# Altium PCB CPUboard.PcbDoc
Units mm, origin at the board's own origin, x right, y up, seen from the top; angles counter-clockwise.
Board outline 73.1 x 74.3 mm, 2 copper layers (Top Layer, Bottom Layer); 31 components, 44 nets, 136 pads, 0 vias.
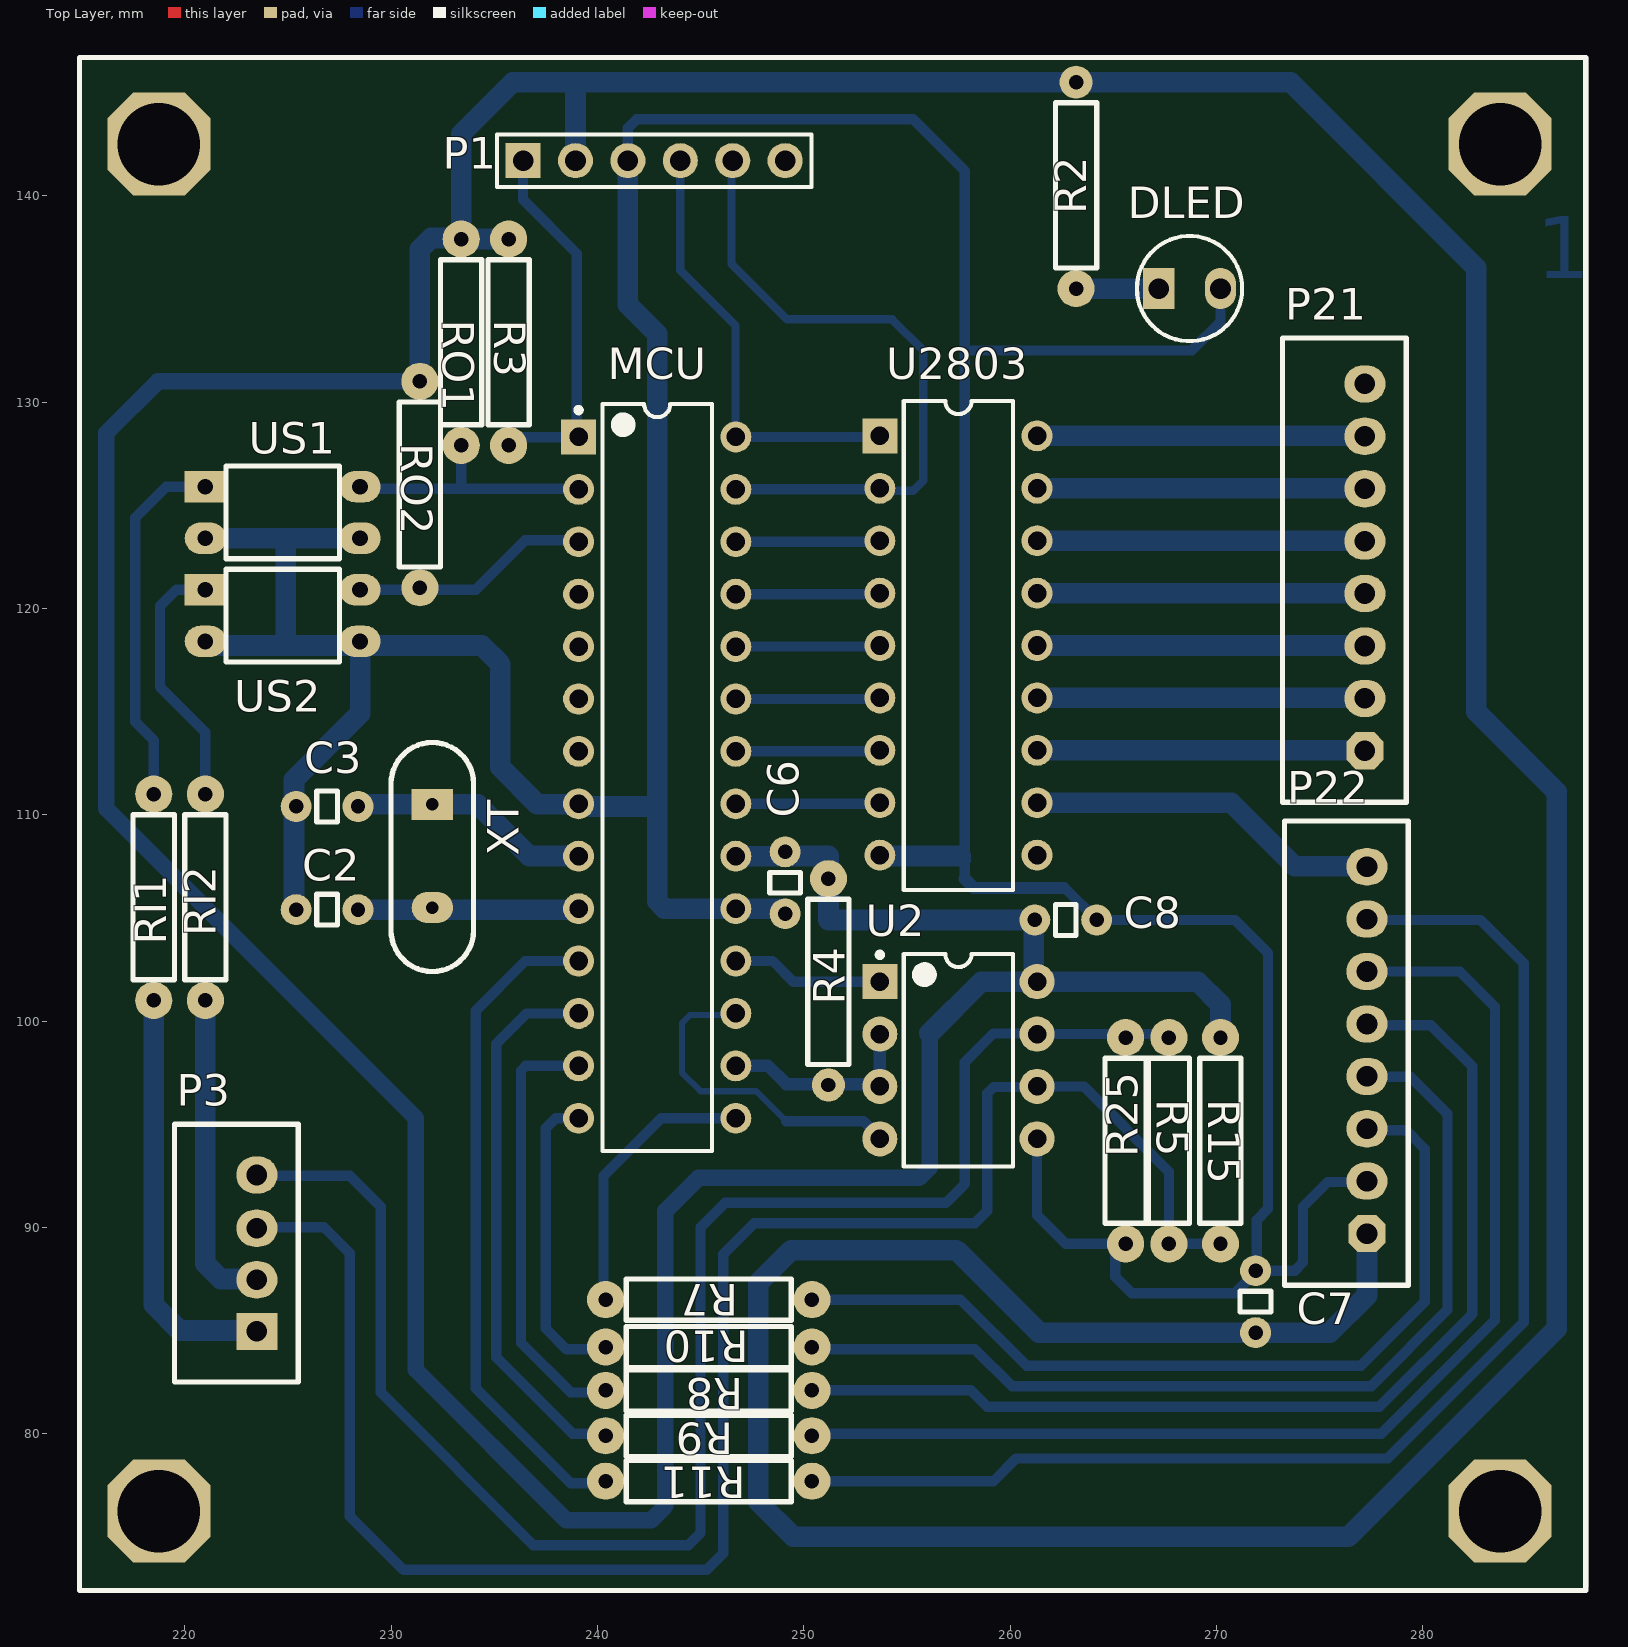
[diagram p0: Top Layer view]
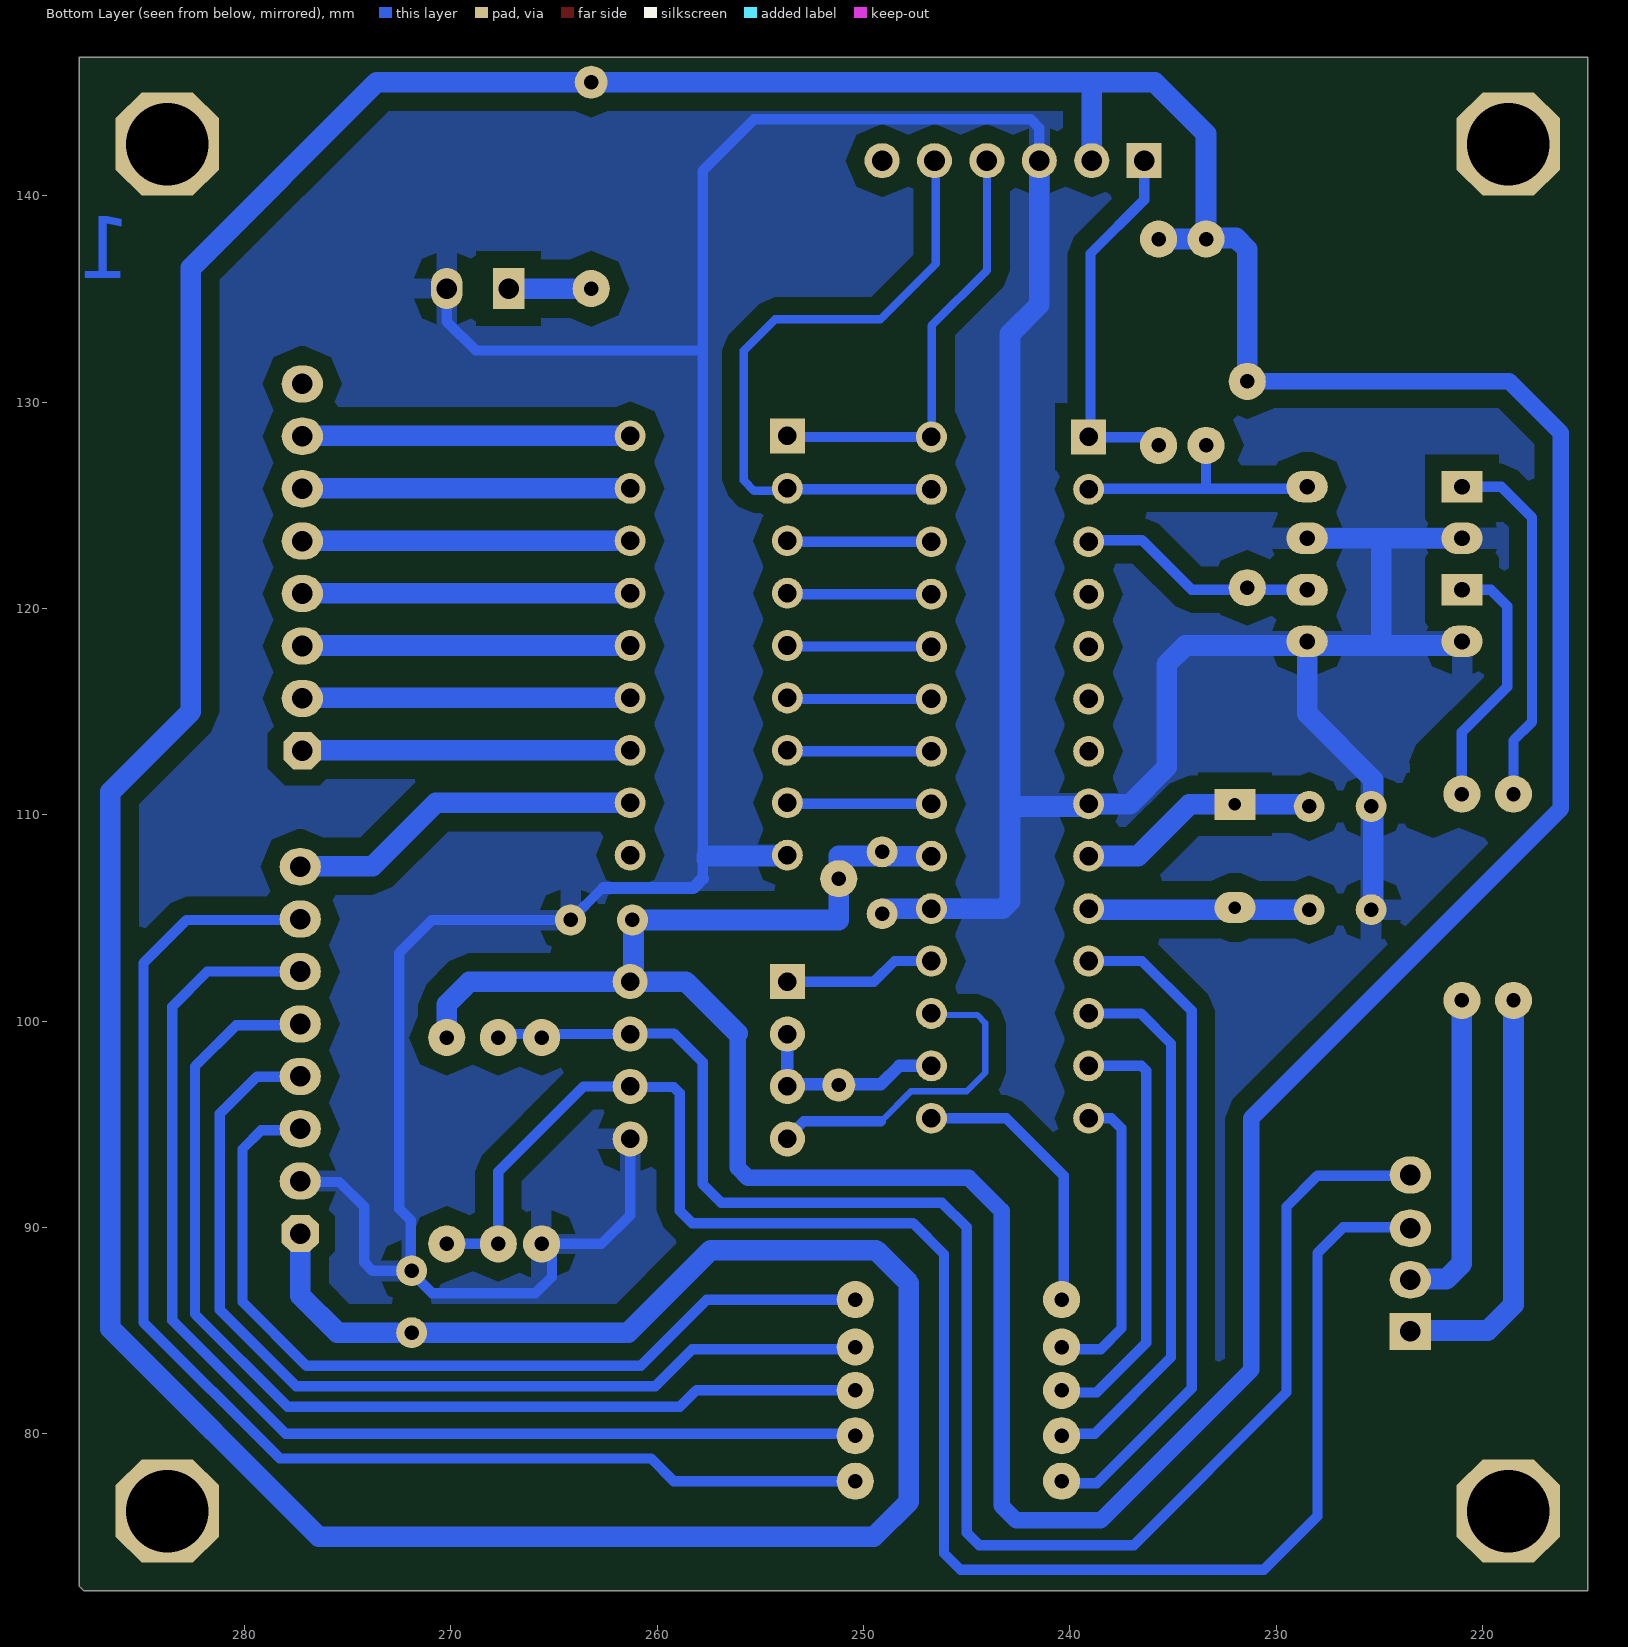
[diagram p1: Bottom Layer view, seen from below]

## Layer stack, top to bottom
Top Layer: signal copper 0.0356
Dielectric: dielectric 0.32, FR-4, Dk 4.8
Bottom Layer: signal copper 0.0356

## Board outline
214.9,146.6 214.9,72.4 287.8,72.4 287.9,72.5 288,72.6 288,146.7 214.9,146.7

## Design rules (kind name [scope] priority, off if disabled: settings)
Clearance [All] p1: gap=0.5
PlaneClearance [All] p1: clearance=0.8
PlaneConnect [All] p1: planeconnectstyle=Relief reliefexpansion=1 reliefentries=4 reliefconductorwidth=1 reliefairgap=1
PolygonConnect [All] p1: connectstyle=Relief reliefconductorwidth=1 reliefentries=4 polygonreliefangle="90 Angle"
RoutingLayers [All] p1: top layer_v5=FALSE bottom layer_v5=TRUE
RoutingTopology [All] p1: topology=Daisy_Balanced
RoutingVias [All] p1: holewidth=1 width=1.5 viastyle="Through Hole" minholewidth=0.711 minwidth=1.27 maxholewidth=1.5 maxwidth=2
SilkscreenOverComponentPads [All] p1: minsilkscreentomaskgap=0.254
SolderMaskExpansion [All] p1: expansion=1
Width [All] p1: maxlimit=2 minlimit=0.4 preferedwidth=1
23 further rules are at their usual default settings.

## Components (designator, comment, footprint, x,y, rotation, side; value= is the part's Value field where it differs from the comment)
C2 "Cap" tu_gom 226.4,105.4 r180 top
C3 "Cap" tu_gom 226.4,110.4 r180 top
C6 "Cap" tu_gom 249.1,106.2 r270 top
C7 "Cap" tu_gom 271.9,85.9 r270 top
C8 "Cap" tu_gom 262.2,104.9 r180 top
DLED "LED0" LED_3 268.2,135.5 r0 top
MCU "PIC16F883-I/SP" SPDIP300-SP28 242.9,111.8 r0 top
P1 "Header 6" HDR1X6 236.4,141.7 r0 top
P3 "Header 4" "CAP 4" 223.5,90 r90 top
P21 "Header 8" Cap_8 277.2,113.1 r90 top
P22 "Header 8" Cap_8 277.3,89.7 r90 top
R2 "1K" R_Nor#1 263.2,140.5 r90 top
R3 "10K" R_Nor#2 235.7,132.9 r90 top
R4 "10K" R_Nor#3 251.2,101.9 r90 top
R5 "120R" R_Nor#2 267.7,94.2 r90 top
R7 "1K" R_Nor#2 245.4,86.5 r0 top
R8 "1K" R_Nor#2 245.4,82.1 r0 top
R9 "1K" R_Nor#2 245.4,79.9 r0 top
R10 "1K" R_Nor#2 245.4,84.2 r0 top
R11 "1K" R_Nor#2 245.4,77.7 r0 top
R15 "560R" R_Nor#2 270.2,94.2 r90 top
R25 "560R" R_Nor#2 265.6,94.2 r90 top
RI1 "1K" R_Nor#2 218.5,106 r270 top
RI2 "1K" R_Nor#2 221,106 r270 top
RO1 "10K" R_Nor#2 233.4,132.9 r90 top
RO2 "10K" R_Nor#2 231.4,126 r90 top
U2 "MAX485CPA" PA8 257.5,98.1 r0 top
U2803 "ULN2803A" DIP18 257.5,118.2 r270 top
US1 "Optoisolator1" Opto 221,123.4 r90 top
US2 "Optoisolator1" Opto 221,118.4 r90 top
XT "XTAL" Xtal12M 230,107.5 r270 top

## Footprints (in the part's own frame and the unit in brackets; to place one, negate y for a bottom-side part, rotate by r counter-clockwise, add the part's x,y. Pads: shape width x height; smd on the part's side, far side on the other; paste and mask are expansions set on the pad)
"CAP 4" [mm]
  rect 1.8x2 hole 1: 1(-5.04,0)
  oval 1.8x2 hole 1: 2(-2.54,0) 3(-0.04,0) 4(2.54,0)
  silkscreen extent -7.5,-2 5,4
Cap_8 [mm]
  oct 1.8x1.8 hole 1: 1(0,0)
  oval 1.8x2 hole 1: 2(2.54,0) 3(5.08,0) 4(7.62,0) 5(10.16,0) 6(12.7,0) 7(15.24,0) 8(17.78,0)
  silkscreen extent -2.5,-2 20,4
DIP18 [mm] "DIP; 18 Leads; Row Spacing 7.62 mm; Pitch 2.54 mm"
  rect 1.7x1.7 hole 0.9: 1(-10.16,-3.81)
  round 1.5 hole 0.9: 2(-7.62,-3.81) 3(-5.08,-3.81) 4(-2.54,-3.81) 5(0,-3.81) 6(2.54,-3.81) 7(5.08,-3.81) 8(7.62,-3.81) 9(10.16,-3.81) 10(10.16,3.81) 11(7.62,3.81) 12(5.08,3.81) 13(2.54,3.81) 14(0,3.81) 15(-2.54,3.81) 16(-5.08,3.81) 17(-7.62,3.81) 18(-10.16,3.81)
  silkscreen extent -11.85,-2.65 11.85,2.65
HDR1X6 [mm] "Connector; Header; 6 Position"
  rect 1.7x1.7 hole 1: 1(0,0)
  round 1.7 hole 1: 2(2.54,0) 3(5.08,0) 4(7.62,0) 5(10.16,0) 6(12.7,0)
  silkscreen extent -1.27,-1.27 13.97,1.27
LED_3 [mm]
  rect 1.524x2 hole 1: 1(-1,0)
  oval 1.524x2 hole 1: 2(2,0)
  silkscreen extent -2.05,-2.55 3.05,2.55
Opto [mm]
  rect 1.524x2 hole 0.762: 1(2.5,0)
  oval 1.524x2 hole 0.762: 2(0,0) 3(0,-7.5) 4(2.5,-7.5)
  silkscreen extent -1,-6.5 3.5,-1
PA8 [mm] "DIP, 8-Leads, Row Spacing 7.62mm, Pitch 2.54mm, Body 9.38x7.24mm"
  rect 1.7x1.7 hole 0.9: 1(-3.81,3.81)
  round 1.7 hole 0.9: 2(-3.81,1.27) 3(-3.81,-1.27) 4(-3.81,-3.81) 5(3.81,-3.81) 6(3.81,-1.27) 7(3.81,1.27) 8(3.81,3.81)
  silkscreen extent -3.93,-5.15 2.65,5.23, body extent -3.6,-5.15 3.6,5.15, height 4.58
R_Nor#1 [mm]
  round 1.8 hole 0.7: 1(-5,0)
  round 1.6 hole 0.7: 2(5,0)
  silkscreen extent -4,-1 4,1
R_Nor#2 [mm]
  round 1.8 hole 0.7: 1(-5,0) 2(5,0)
  silkscreen extent -4,-1 4,1
R_Nor#3 [mm]
  round 1.6 hole 0.7: 1(-5,0)
  round 1.8 hole 0.7: 2(5,0)
  silkscreen extent -4,-1 4,1
SPDIP300-SP28 [mm] "DIP, 28-Leads, Row Spacing 7.62mm, Pitch 2.54mm, Body 34.9x6.8mm"
  rect 1.7x1.7 hole 0.9: 1(-3.81,16.51)
  round 1.5 hole 0.9: 2(-3.81,13.97) 3(-3.81,11.43) 4(-3.81,8.89) 5(-3.81,6.35) 6(-3.81,3.81) 7(-3.81,1.27) 8(-3.81,-1.27) 9(-3.81,-3.81) 10(-3.81,-6.35) 11(-3.81,-8.89) 12(-3.81,-11.43) 13(-3.81,-13.97) 14(-3.81,-16.51) 15(3.81,-16.51) 16(3.81,-13.97) 17(3.81,-11.43) 18(3.81,-8.89) 19(3.81,-6.35) 20(3.81,-3.81) 21(3.81,-1.27) 22(3.81,1.27) 23(3.81,3.81) 24(3.81,6.35) 25(3.81,8.89) 26(3.81,11.43) 27(3.81,13.97) 28(3.81,16.51)
  silkscreen extent -3.93,-18.1 2.65,18.1, body extent -3.55,-18.1 3.55,18.1, height 5.08
tu_gom [mm]
  round 1.5 hole 0.7: 1(-2,0) 2(1,0)
  silkscreen extent -1,-0.75 0,0.75
Xtal12M [mm]
  rect 1.5x2 hole 0.6: 1(-3,2)
  oval 1.5x2 hole 0.6: 2(2,2)
  silkscreen extent -6,0 5.1,4

## Part data
C2 C3 C6 C7 C8: library part Ceramic, "Capcitor"
DLED: "Typical INFRARED GaAs LED"
MCU: "Flash-Based, 8-Bit CMOS Microcontroller with nanoWatt Technology, 4K (x14-Bit words) Program Memory, 512 Bytes Data Memory, 24 I/O pins, 28-Pin SPDIP, Standard VDD Range, Industrial Temperature"
P1: "Header, 6-Pin"
P3: "Header, 4-Pin"
P21 P22: "Header, 8-Pin"
R2 R3 R4 R5 R7 R8 R9 R10 R11 R15 R25 RI1 RI2 RO1 RO2: library part Res
U2: "Low-Power, Slew-Rate-Limited RS-485/RS-422 Transceiver"
U2803: "Eight Darlington Array"
US1 US2: "4-Pin Phototransistor Optocoupler"
XT: "Crystal Oscillator"

## Free pads (board coordinates)
  oct 5x5 hole 4: 0(218.75,142.5) 1(283.75,142.5) 2(283.75,76.25) 3(218.75,76.25)

## Nets (pads, with @x,y where several pads share a name; then routed paths per layer and width w, separated by ;. In a path a pad name is that pad's centre, name@x,y a point inside that pad or via, vN(x,y) a via of type N, cw(c..) or ccw(c..) an arc to the next point about the centre after c; other vN are vias at no path point)
A: P21.7 U2803.18 | length 15.9
  Bottom Layer w1: U2803.18 P21.7@277.16,128.36
A1: P22.3 R7.2 | length 43.1
  Bottom Layer w0.5: R7.2@250.3,86.5 R7.2 257.6,86.5 260.8,83.3 277,83.3 280.1,86.4 280.1,93.8 279.2,94.7 P22.3@277.3,94.7 ; R7.2@250.8,87 R7.2@250.85,86.95
A2: P22.4 R10.2 | length 46.4
  Bottom Layer w0.5: R10.2@251.2,84.1 258.3,84.1 260.1,82.3 277.5,82.3 281.2,86 281.2,95.5 279.4,97.3 P22.4@277.3,97.3
A3: P22.5 R8.2 | length 52.3
  Bottom Layer w0.5: R8.2@250.3,82.4 250.4,82.4 250.55,82.25 250.7,82.1 258.1,82.1 258.9,81.3 277.9,81.3 282.4,85.8 282.4,97.8 280.4,99.8 P22.5@277.3,99.8
A4: P22.6 R9.2 | length 57.7
  Bottom Layer w0.5: R9.2@250.2,80.3 R9.2@250.4,80.3 ; R9.2@250.5,80.3 250.65,80.15 250.8,80 278,80 283.5,85.5 283.5,100.7 281.8,102.4 P22.6
A5: P22.7 R11.2 | length 63.6
  Bottom Layer w0.5: R11.2 259.2,77.7 260.3,78.8 278.3,78.8 284.9,85.4 284.9,102.8 282.8,104.9 P22.7@277.3,104.9
A_485: P3.3 R5.1 R15.1 U2.6 | length 87.8
  Bottom Layer w0.5: P3.3@223.5,90 226.75,90 228,88.75 228,76 230.6,73.4 245.3,73.4 246.1,74.2 246.1,88.7 247.6,90.2 258.3,90.2 258.9,90.8 258.9,96.5 259.2,96.8 261.31,96.8 U2.6@261.4,96.8 ; U2.6 263.57,96.83 267.7,92.7 R5.1 R15.1@270.1,89.2
B: P21.6 U2803.17 | length 16
  Bottom Layer w1: U2803.17 277.2,125.82 P21.6@277.28,125.82
B_485: P3.4 R5.2 R25.2 U2.7 | length 79.8
  Bottom Layer w0.5: P3.4@223.5,92.5 228,92.5 229.5,91 229.5,82 236.9,74.6 244.4,74.6 245,75.2 245,90 246.2,91.2 256.9,91.2 257.8,92.1 257.8,98 259.2,99.4 U2.7@261.3,99.4 ; U2.7 265.6,99.37 R5.2@267.43,99.37 ; R5.2@267.4,99.4 R5.2@267.43,99.37 ; R5.2@267.65,99.15 R5.2@267.43,99.37 ; R5.2@267.9,99.37 267.7,99.37 R5.2@267.43,99.37
C: P21.5 U2803.16 | length 15.9
  Bottom Layer w1: U2803.16 277.2,123.28 P21.5@277.22,123.28
D: P21.4 U2803.15 | length 16
  Bottom Layer w1: U2803.15 277.2,120.74 P21.4@277.26,120.74
DI: MCU.17 U2.4 | length 16
  Bottom Layer w0.3: MCU.17@246.8,100.3 246.71,100.3 244.5,100.3 244.1,99.9 244.1,97.5 245,96.6 247.7,96.6 249.15,95.15 249.2,95.1
  Bottom Layer w0.5: 249.15,95.15 252.754,95.15 ; 252.9,95.15 U2.4@253.65,94.4
DOT: P22.8 U2803.11 | length 17.4
  Bottom Layer w1: U2803.11 270.72,110.58 273.8,107.5 277.3,107.5 P22.8@277.4,107.5
E: P21.3 U2803.14 | length 16.1
  Bottom Layer w1: U2803.14 277.2,118.2 P21.3@277.4,118.2
EN: MCU.16 R4.1 U2.2 U2.3 | length 9.8
  Bottom Layer w0.6: MCU.16@246.715,97.835 248.265,97.835 249.16,96.94 251.2,96.94 253.69,96.94 U2.2 ; U2.3@253.65,96.9 U2.3@253.69,96.9
F: P21.2 U2803.13 | length 15.9
  Bottom Layer w1: U2803.13 P21.2@277.16,115.66
G: P21.1 U2803.12 | length 15.9
  Bottom Layer w1: U2803.12 P21.1@277.18,113.12
GND: C2.2 C3.2 C6.2 C7.1 C8.1 DLED.2 MCU.8 MCU.19 P1.3 P22.2 R25.1 U2.5 U2803.9 US1.2 US1.3 US2.2 US2.3 | length 227.6
  Bottom Layer w0.5: C3.2@225.3,110.4 C3.2@225.3,110.5 ; C3.2@225.4,110.3 C3.2 C3.2@225.4,110.5 ; MCU.8 239.09,110.46 MCU.8@239.15,110.4 ; P1.3 241.48,143.28 241.9,143.7 255.3,143.7 257.8,141.2 257.8,107.8 257.8,106.9 ; 257.9,132.5 268.8,132.5 270.2,133.9 DLED.2 ; U2.5@261.3,94.3 U2.5@261.31,94.3 ; U2.5 261.31,90.59 262.7,89.2 265.1,89.2 265.1,87.6 265.9,86.8 270.9,86.8 271.95,87.85 C7.1@271.95,87.9 ; 262.7,106.4 C8.1 ; C8.1 270.9,104.9 272.5,103.3 272.5,90.9 271.95,90.35 C7.1@271.95,87.9 ; C7.1 C7.1@271.95,87.9 ; P22.2@276.8,92.1 276.7,92.2 275.4,92.2 274.2,91 274.2,88.3 273.8,87.9 C7.1@271.95,87.9
  Bottom Layer w0.6: 257.6,108 257.8,107.8 ; 257.8,106.9 258.25,106.45 262.6,106.45
  Bottom Layer w1: US2.2@221,118.2 224.9,118.2 ; US1.2 US1.3 ; 224.9,123.3 224.9,118.2 ; C2.2@225.3,105.5 C3.2@225.3,110.4 ; C3.2@225.3,110.5 225.3,111.7 228.5,114.9 US2.3@228.5,118.2 ; MCU.8@239,110.5 237.1,110.5 235.3,112.3 235.3,117.3 234.4,118.2 US2.3@228.5,118.2 ; MCU.8@239.15,110.4 242.9,110.4 ; P1.3 241.48,134.72 242.9,133.3 242.9,110.4 ; MCU.19@246.66,105.4 MCU.19 ; C6.2@249.225,105.325 249.1,105.45 MCU.19 ; U2803.9@253.6,108 253.69,108 257.6,108 ; U2.5 U2.5@261.4,94.2 ; 224.9,118.2 US2.3@228.5,118.2 ; 242.9,110.4 242.9,105.8 243.25,105.45 MCU.19
ICSPCLK: MCU.27 P1.5 U2803.2 | length 31.6
  Bottom Layer w0.4: P1.5@246.5,141.7 246.5,136.7 249.19,134.01 254.29,134.01 255.8,132.5 255.8,126.2 255.3,125.7 U2803.2@253.69,125.7
  Bottom Layer w0.5: MCU.27 U2803.2@253.57,125.77 ; U2803.2@253.6,125.7 U2803.2@253.69,125.7
ICSPDAT: MCU.28 P1.4 U2803.1 | length 21.4
  Bottom Layer w0.4: P1.4 244.02,136.38 246.7,133.7 MCU.28@246.7,128.31
  Bottom Layer w0.5: MCU.28@246.7,128.3 MCU.28@246.7,128.31 ; MCU.28 U2803.1@253.59,128.31
IN3: MCU.26 U2803.3 | length 6.9
  Bottom Layer w0.5: MCU.26 U2803.3@253.63,123.23
IN4: MCU.25 U2803.4 | length 6.8
  Bottom Layer w0.5: MCU.25 U2803.4@253.49,120.69
IN5: MCU.24 U2803.5 | length 7
  Bottom Layer w0.5: MCU.24 253.69,118.15 U2803.5@253.75,118.15
IN6: MCU.23 U2803.6 | length 7
  Bottom Layer w0.5: MCU.23 U2803.6@253.69,115.61
IN7: MCU.22 U2803.7 | length 7
  Bottom Layer w0.5: MCU.22 U2803.7@253.67,113.07
IN8: MCU.21 U2803.8 | length 6.9
  Bottom Layer w0.5: MCU.21 U2803.8@253.63,110.53
LVP: P1.6
MCLR: MCU.1 P1.1 R3.1 | length 18
  Bottom Layer w0.5: R3.1 236.1,128.3 MCU.1@239,128.3 ; P1.1 236.4,139.8 239,137.2 239,128.31 MCU.1@239,128.3 ; MCU.1@239.1,128.3 239.09,128.3 MCU.1@239,128.3
NetC2_1: C2.1 MCU.10 XT.2 | length 11.3
  Bottom Layer w0.5: C2.1@228.1,105.4 C2.1 ; XT.2@231.8,105.3 XT.2@231.9,105.4 ; XT.2@232,105.4 XT.2@231.9,105.4 ; XT.2 XT.2@231.9,105.4 ; MCU.10@239.09,105.4 MCU.10@239.1,105.4
  Bottom Layer w1: C2.1 XT.2@231.9,105.4 ; XT.2@232,105.4 MCU.10@239.09,105.4
NetC3_1: C3.1 MCU.9 XT.1 | length 11.9
  Bottom Layer w0.5: C3.1@228.3,110.5 C3.1@228.4,110.5 ; XT.1@231.9,110.5 XT.1
  Bottom Layer w1: C3.1@228.4,110.5 XT.1 234.2,110.5 236.7,108 MCU.9@239.09,108
NetDLED_1: DLED.1 R2.1 | length 3.9
  Bottom Layer w0.5: DLED.1@267,135.5 DLED.1@267.1,135.4
  Bottom Layer w1: R2.1 DLED.1@267,135.5
NetMCU_11: MCU.11 R11.1 | length 32.5
  Bottom Layer w0.5: MCU.11 236.51,102.91 234.1,100.5 234.1,82.2 238.7,77.6 R11.1@240.4,77.6
NetMCU_12: MCU.12 R9.1 | length 26.1
  Bottom Layer w0.5: MCU.12 236.57,100.37 235.1,98.9 235.1,83.7 238.8,80 R9.1@239.9,80
NetMCU_13: MCU.13 R8.1 | length 20.7
  Bottom Layer w0.5: MCU.13 236.53,97.83 236.3,97.6 236.3,84.4 238.7,82 R8.1@239.8,82 ; R8.1@240.15,82.35 R8.1@240.2,82.4
NetMCU_14: MCU.14 R10.1 | length 14.8
  Bottom Layer w0.5: MCU.14 237.99,95.29 237.5,94.8 237.5,85.1 238.5,84.1 R10.1@240.4,84.1
NetMCU_15: MCU.15 R7.1 | length 13
  Bottom Layer w0.5: R7.1@240.3,87.1 240.3,92.5 243.09,95.29 MCU.15
NetRI1_1: RI1.1 US1.1 | length 17.9
  Bottom Layer w0.5: RI1.1 218.5,113.6 217.6,114.5 217.6,124.4 219.1,125.9 US1.1 ; US1.1@221,125.8 US1.1@221.1,125.8
NetRI2_1: RI2.1 US2.1 | length 12.6
  Bottom Layer w0.5: RI2.1 221,114 218.8,116.2 218.8,120.1 219.6,120.9 US2.1 US2.1@221.1,120.9
RO: MCU.18 U2.1 | length 7.4
  Bottom Layer w0.5: MCU.18 248.49,102.91 249.5,101.9 253.69,101.9 U2.1@253.7,101.9
SENSOR1: P3.1 RI1.2 | length 20.3
  Bottom Layer w1: RI1.2 218.5,86.25 219.75,85 P3.1@223.5,85
SENSOR2: P3.2 RI2.2 | length 15.6
  Bottom Layer w1: RI2.2 221,88.25 221.75,87.5 P3.2@223.5,87.5
SENSOR_IN1: MCU.2 RO1.1 US1.4 | length 12.9
  Bottom Layer w0.5: US1.4@228.4,125.8 228.5,125.8 MCU.2@239.09,125.8 ; 233.4,125.8 RO1.1 ; MCU.2@239.08,125.78 MCU.2@239.1,125.8 ; MCU.2@239.2,125.8 MCU.2@239.1,125.8 ; MCU.2@239.09,125.8 MCU.2@239.1,125.8 ; MCU.2@239.09,125.8 MCU.2@239.1,125.8
SENSOR_IN2: MCU.3 RO2.1 US2.4 | length 11.4
  Bottom Layer w0.5: US2.4@228.6,120.9 231.4,120.9 234.1,120.9 236.5,123.3 MCU.3@239,123.3 ; MCU.3@239.09,123.3 MCU.3@239.1,123.3
VCC: C6.1 C7.2 C8.2 MCU.20 P1.2 P22.1 R2.2 R3.2 R4.2 R15.2 RO1.2 RO2.2 U2.8 | length 372
  Bottom Layer w0.5: RO1.2@233.35,137.95 RO1.2@233.4,138
  Bottom Layer w0.8: RO2.2 218.7,131 216.2,128.5 216.2,110.3 231.2,95.3 231.2,83.1 238.5,75.8 242.6,75.8 243.3,76.5 243.3,90.8 244.9,92.4 255.6,92.4 256.1,92.9 256.1,99.4
  Bottom Layer w1: RO2.2 231.4,137.4 231.95,137.95 RO1.2@233.05,137.95 ; RO1.2@233,137.9 RO1.2@233.05,137.95 ; RO1.2@233.2,138.1 RO1.2@233.05,137.95 ; RO1.2@233.35,137.95 RO1.2@233.05,137.95 ; RO1.2 R3.2@235.6,137.9 ; RO1.2@233.4,138.3 233.4,143 235.9,145.5 R2.2 273.6,145.5 282.6,136.5 282.6,115 286.5,111.1 286.5,85.1 276.4,75 249.5,75 247.8,76.7 247.8,87.3 249.4,88.9 257.4,88.9 261.4,84.9 C7.2 275.5,84.9 277.3,86.7 P22.1 ; P1.2 238.94,145.44 ; MCU.20 249.1,107.99 C6.1@249.5,107.99 ; C6.1@249.5,108 251.2,108 R4.2 251.2,104.9 260.9,104.9 261.05,104.75 261.15,104.65 261.15,102.15 261.35,101.95 261.4,101.9 269.1,101.9 270.2,100.8 R15.2 ; 256.1,99.4 258.61,101.91 U2.8 ; U2.8@261.15,101.9 261.225,101.825 U2.8@261.4,101.65
pads on no net: MCU.4 MCU.5 MCU.6 MCU.7 P21.8 U2803.10

## Polygon pours and split planes (outlines as drawn)
GND on Bottom Layer "Top Layer-No Net" (solid, remove dead copper, pour order 1000): 214.9,146.8 214.8,146.7 214.8,72.4 287.7,72.4 287.9,72.2 287.8,72.3 287.8,146.8 215.2,146.8 215,146.6

## Other copper
Bottom Layer:
  text "1" at 285.5,136 h3

## Silkscreen, mask and mechanical layers (free items; w line width, h text height)
Top Overlay:
  lines w0.254: 214.9,72.4 214.9,146.7 287.9,146.7 287.9,72.4 214.9,72.4